# Altium PCB esp8266sensor.PcbDoc
Units mm, origin at the board's own origin, x right, y up, seen from the top; angles counter-clockwise.
Board outline 69 x 25.25 mm, 2 copper layers (Top Layer, Bottom Layer), stack 1.57 mm thick; 37 components, 21 nets, 86 pads, 60 vias.
Unrouted connection lines stored in the file: 9.
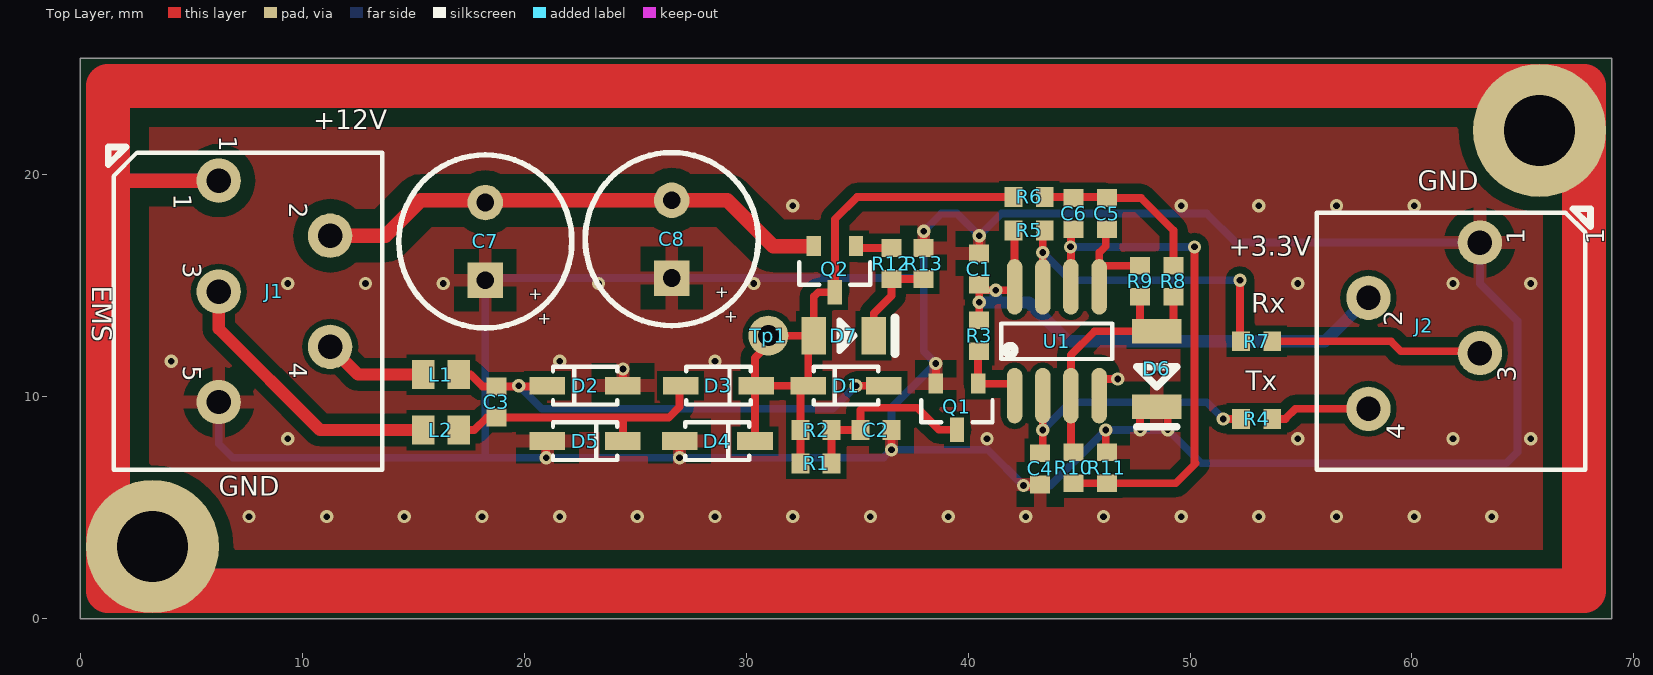
[diagram p0: Top Layer view]
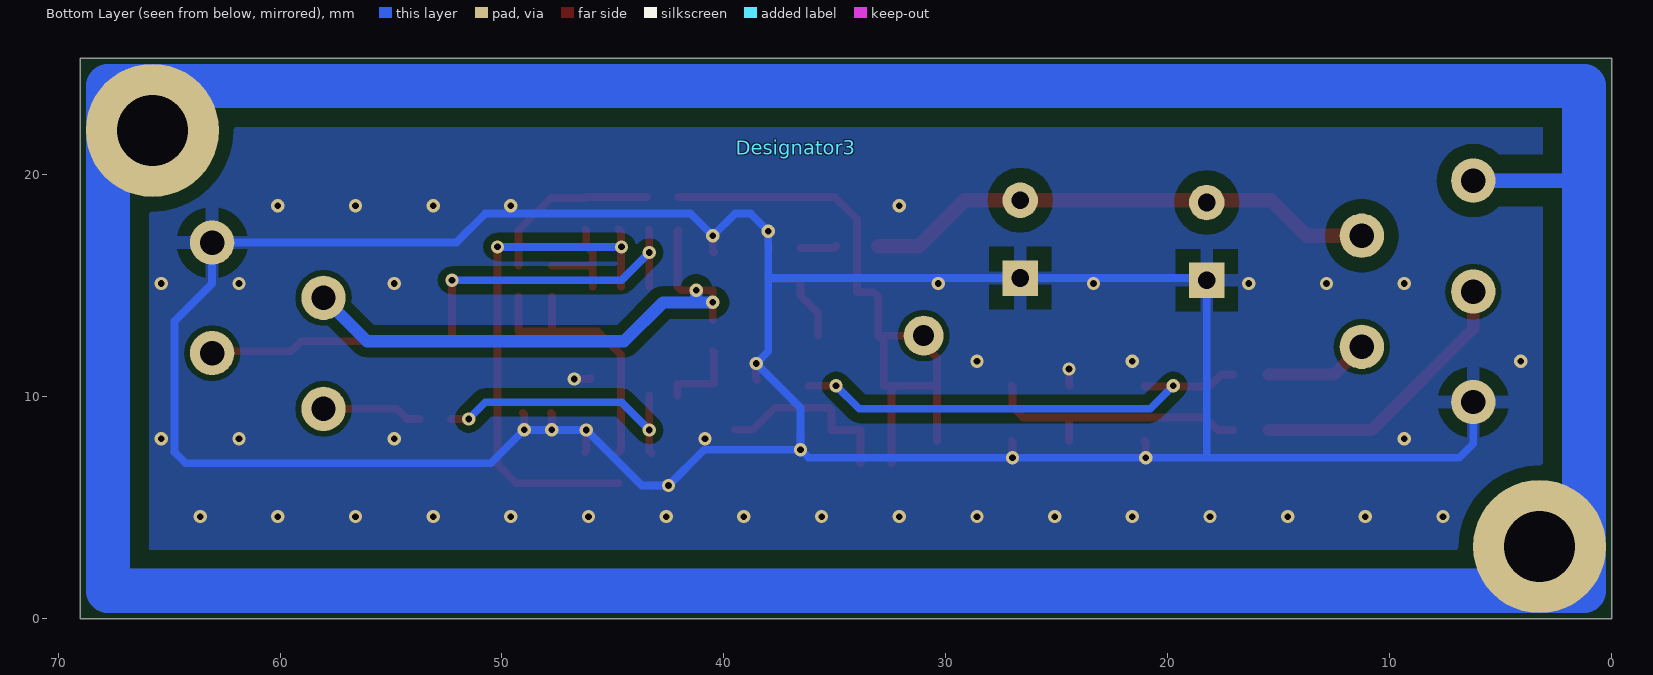
[diagram p1: Bottom Layer view, seen from below]
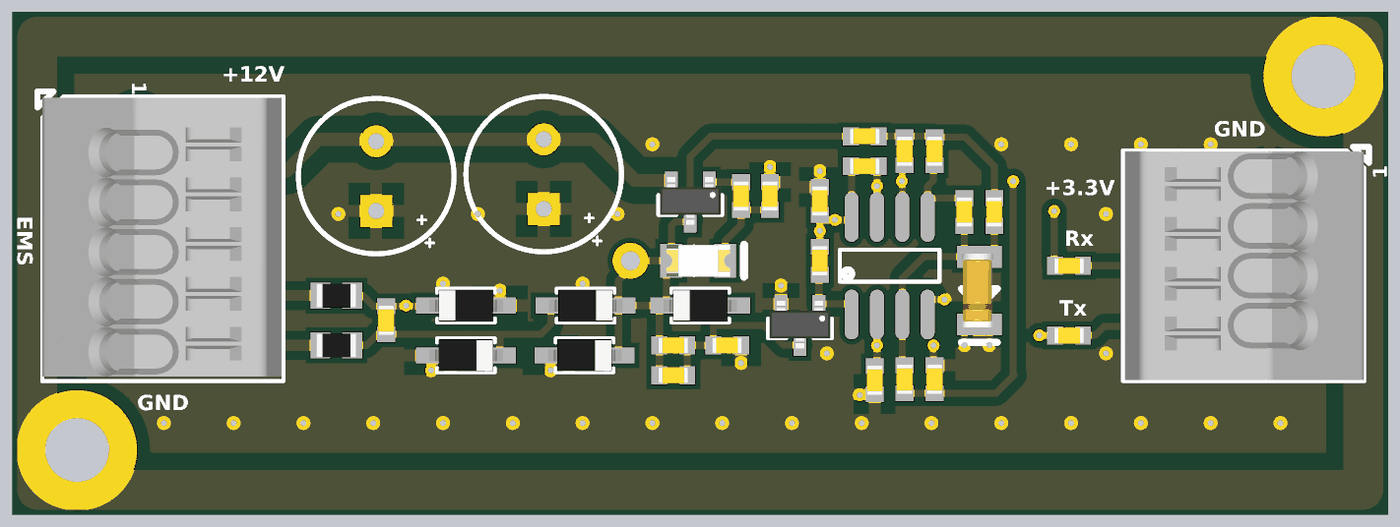
[diagram p2: 3D render of the assembled board from above, using the file's embedded part models]

## Layer stack, top to bottom
Top Solder: solder mask 0.01, Solder Resist, Dk 3.5
Top Layer: signal copper 0.035
Dielectric1: core 1.5, FR-4, Dk 4.2
Bottom Layer: signal copper 0.035
Bottom Solder: solder mask 0.01, Solder Resist, Dk 3.5

## Board outline
0,0 0,25.25 69,25.25 69,0

## Design rules (kind name [scope] priority, off if disabled: settings)
Clearance Clearance_1 [InNet('GND') vs InNet('SHLD')] p1: gap=0.65 ignorepadtopadclearanceinfootprint=FALSE except(0.85: Arc-Fill Arc-Poly Arc-Region Arc-Hole Track-Fill Track-Poly Track-Region Track-Hole)
Clearance Clearance_2 [InNet('GND') vs InNet('+12V')] p2: gap=0.65 ignorepadtopadclearanceinfootprint=FALSE except(0.85: Arc-Fill Arc-Poly Arc-Region Arc-Hole Track-Fill Track-Poly Track-Region Track-Hole)
Clearance [All] p3: gap=0.25 ignorepadtopadclearanceinfootprint=FALSE except(0.45: Arc-Fill Arc-Poly Arc-Region Track-Fill Track-Poly Track-Region)
ComponentClearance ComponentClearance_logo [HasFootprint('Develer_logo_30x12mm_PCB_NOTE') vs HasFootprint('Develer_logo_30x12mm_TB_Top')] p1: gap=0 collisioncheckmode=3 verticalgap=0 showdistances=FALSE
ComponentClearance [All] p2: gap=0.25 collisioncheckmode=3 verticalgap=0.25 showdistances=FALSE
DiffPairsRouting [All] p1: maxlimit=0.25 minlimit=0.25 mostfreqgap=0.25 toplayer_minwidth=0.25 toplayer_maxwidth=0.25 toplayer_prefwidth=0.25 bottomlayer_minwidth=0.25 bottomlayer_maxwidth=0.25 bottomlayer_prefwidth=0.25 maxuncoupledlength=12.7
Height [All] p1: minheight=0 maxheight=25 prefheight=12.5
HoleSize [All] p1: absolutevalues=TRUE maxlimit=10 minlimit=0.2 maxpercent=80.000 minpercent=20.000
HoleToHoleClearance [All] p1: gap=0.25 allowstackedmicrovias=TRUE
MinimumSolderMaskSliver [All] p1: minsoldermaskwidth=0.15
PlaneClearance [All] p1: clearance=0.5
PlaneConnect PlaneConnect_via [isvia] p1: planeconnectstyle=Direct reliefexpansion=0.508 reliefentries=4 reliefconductorwidth=0.254 reliefairgap=0.254
PlaneConnect [All] p2: planeconnectstyle=Relief reliefexpansion=0.6 reliefentries=4 reliefconductorwidth=0.6 reliefairgap=0.3
PolygonConnect PolygonConnect_via [isvia] p1: connectstyle=Direct reliefconductorwidth=0.254 reliefentries=4 polygonreliefangle="90 Angle" airgapwidth=0.254
PolygonConnect [All] p2: connectstyle=Relief reliefconductorwidth=0.6 reliefentries=4 polygonreliefangle="90 Angle" airgapwidth=0.6
RoutingCorners [All] p1: cornerstyle=45-Degree minsetback=2.5 maxsetback=2.5
RoutingVias [All] p1: holewidth=0.3 width=0.6 viastyle="Through Hole" minholewidth=0.2 minwidth=0.3 maxholewidth=0.5 maxwidth=1
SilkToSilkClearance [All] p1: silktosilkclearance=0.15
SilkToSolderMaskClearance [IsPad] p1: minsilkscreentomaskgap=0.15 clearancetoexposedcopper=TRUE
SolderMaskExpansion SolderMaskExpansion_via [isVia] p1: expansion=-10
SolderMaskExpansion [All] p2: expansion=0.05
UnRoutedNet [All] p1: checkbadconnections=TRUE
Width [All] p1: maxlimit=5 minlimit=0.15 preferedwidth=0.25
18 further rules are at their usual default settings.

## Components (designator, comment, footprint, x,y, rotation, side; value= is the part's Value field where it differs from the comment)
C1 "100nF" 0603_[1608] 40.5,15.75 r270 top value=100pF
C2 "1.5nF" 0603_[1608] 35.85,8.5 r180 top value=100pF
C3 "68pF" 0603_[1608] 18.75,9.761 r90 top value=100pF
C4 "10nF" 0603_[1608] 43.25,6.75 r90 top value=100pF
C5 "10uF" 0603_[1608] 46.25,18.25 r90 top value=100pF
C6 "1nF" 0603_[1608] 44.75,18.25 r90 top value=100pF
C7 "820uF" CAP_CYL_3.5mm_D8mm 18.25,17 r90 top value=100pF
C8 "820uF" CAP_CYL_3.5mm_D8mm 26.651,17.099 r90 top value=100pF
D1 "MBR0530" SOD-123_K2-A1 34.5,10.5 r180 top
D2 "MBR0530" SOD-123_K2-A1 22.75,10.5 r180 top
D3 "MBR0530" SOD-123_K2-A1 28.75,10.5 r0 top
D4 "MBR0530" SOD-123_K2-A1 28.7,8 r0 top
D5 "MBR0530" SOD-123_K2-A1 22.75,8 r0 top
D6 "1N4148" SOD-80C 48.5,11.25 r90 top
D7 "LED" 1206_[3216]_K1-A2_LED 34.4,12.75 r180 top
Designator3 "Comment" db_firma 36.75,21.25 r180 bottom
J1 "EMS" CON_5P_WAGO_2.5MM 8.75,14.75 r270 top
J2 "SUPPLY" CON_4P_WAGO_2.5MM 61.75,12.5 r90 top
L1 "220 ohm @ 100MHz" 0805_[2012] 16.25,11 r180 top
L2 "220 ohm @ 100MHz" 0805_[2012] 16.25,8.5 r180 top
Q1 "BC817" SOT-23 39.5,9.55 r270 top
Q2 "BC817" SOT-23 34,15.75 r270 top
R1 "470R" 0603_[1608] 33.15,7 r0 top value=1K
R2 "470R" 0603_[1608] 33.15,8.5 r0 top value=1K
R3 "4k7" 0603_[1608] 40.5,12.75 r270 top value=1K
R4 "0R" 0603_[1608] 53,9 r0 top value=1K
R5 "4k7" 0603_[1608] 42.75,17.5 r0 top value=1K
R6 "10k" 0603_[1608] 42.75,19 r0 top value=1K
R7 "100R" 0603_[1608] 53,12.5 r0 top value=1K
R8 "360R" 0603_[1608] 49.25,15.2 r90 top value=1K
R9 "47k" 0603_[1608] 47.75,15.2 r90 top value=1K
R10 "10k" 0603_[1608] 44.75,6.8 r270 top value=1K
R11 "100k" 0603_[1608] 46.25,6.8 r270 top value=1K
R12 "10k" 0603_[1608] 36.55,16 r270 top value=1K
R13 "10k" 0603_[1608] 38,16 r270 top value=1K
Tp1 "UEMS" TEST_POINT_THD_D1.8MM 31,12.75 r0 top
U1 "LM393N" SOIC8 44,12.5 r90 top

## Footprints (in the part's own frame and the unit in brackets; to place one, negate y for a bottom-side part, rotate by r counter-clockwise, add the part's x,y. Pads: shape width x height; smd on the part's side, far side on the other; paste and mask are expansions set on the pad)
0603_[1608] [mm] "Chip Capacitor, Body 1.6x0.8mm, IPC High Density"
  rect 0.8x0.9 smd: 1(-0.7,0) 2(0.7,0)
  body extent -0.75,-0.4 0.75,0.4, height 0.67
0805_[2012] [mm] "Chip Resistor, Body 2.0x1.2mm, IPC High Density"
  rect 1x1.3 smd: 1(-0.8,0) 2(0.8,0)
  body extent -1,-0.6 1,0.6, height 0.62
1206_[3216]_K1-A2_LED [mm] "Chip Capacitor, Body 3.2x1.6mm, IPC High Density"
  rect 1.1x1.7 smd: 1(-1.35,0) 2(1.35,0)
  silkscreen extent -2.3,-0.8 0.2,0.8, body extent -1.6,-0.8 1.6,0.8, height 0.68
CAP_CYL_3.5mm_D8mm [mm] "Capacitor cylinder pitch 3.5mm Diameter 8mm hole 0.8mm"
  rect 1.6x1.6 hole 0.8: 1(-1.75,0)
  round 1.6 hole 0.8: 2(1.75,0)
  silkscreen extent -3.9,-3.9 3.9,3.9, body extent -4,-4 4,4, height 12.1
CON_4P_WAGO_2.5MM [mm]
  round 2 hole 1.1: 1(4.447,-1.31) 2(1.957,3.71) 3(-0.532,-1.31) 4(-3.046,3.71)
  silkscreen extent -5.8,-6.29 5.97,6.05, body extent -5.75,-6.05 5.75,5.95, height 13.1
CON_5P_WAGO_2.5MM [mm]
  round 2 hole 1.1: 1(-4.989,-2.51) 2(-2.504,2.51) 3(0.011,-2.51) 4(2.5,2.51) 5(4.989,-2.51)
  silkscreen extent -6.5,-7.49 8.04,4.85, body extent -6.19,-7.25 7.81,4.75, height 13.2
db_firma [mm]
SOD-80C [mm] "Melf Body 4.5 x 2.5 mm (LxW typ)"
  rect 1.1x2.25 smd: 1(-1.7,0) 2(1.7,0)
  silkscreen extent -2.6,-0.9 0.1,0.9, body extent -1.85,-0.7 1.85,0.9, height 1.6
SOD-123_K2-A1 [mm] "SOD-123; 2 Leads; Body 2.7 x 1.6 mm, (LxW)"
  rect 1.6x0.8 smd: 1(-1.7,0) 2(1.7,0)
  silkscreen extent -1.45,-0.85 1.45,0.85, body extent -1.85,-0.8 1.85,0.8, height 1.27
SOIC8 [mm] "SOIC, 8-Leads, Body 4.9x3.8mm, Pitch 1.27mm, IPC Low Density"
  oval 2.5x0.7 smd: 1(-2.45,1.905) 2(-2.45,0.635) 3(-2.45,-0.635) 4(-2.45,-1.905) 5(2.45,-1.905) 6(2.45,-0.635) 7(2.45,0.635) 8(2.45,1.905)
  silkscreen extent -0.8,-2.5 0.8,2.5, body extent -2,-2.5 2,2.5, height 1.75
SOT-23 [mm] "SOT23, 3-Leads, Body 2.9x1.3mm, Pitch 0.95mm, Lead Span 2.5mm, IPC High Density"
  rect 0.9x0.65 smd: 1(-1.038,0.95) 2(-1.038,-0.95)
  rect 1.1x0.65 smd: 3(1.038,0)
  silkscreen extent -0.3,-1.6 0.7,1.6, body extent -1.2,-1.52 1.2,1.52, height 1.22
TEST_POINT_THD_D1.8MM [mm] "Test point D=1.6MM"
  round 1.8 hole 0.95 paste-10 mask+0.05: 1(0,0)

## Part data
C1 C2 C3 C4 C5 C6 C7 C8: library part Cap, "Ceramic X7R 50V", LatestRevisionDate=17-Jul-2002, LatestRevisionNote="Re-released for DXP Platform.", PackageDescription="Radial Cap, Thru-Hole; 2 Leads; 0.3 in Pin Spacing", PackageReference=RAD-0.3, Published=8-Jun-2000, Publisher="Altium Limited"
D1 D2 D3 D4 D5: library part Diode_SCHOTTKY, "Schottky Diodes"
D6: library part Diode
D7: "Multicolor LED"
J1: library part "Header 5", "Header, 5-Pin", LatestRevisionDate=17-Jul-2002, LatestRevisionNote="Re-released for DXP Platform.", Publisher="Altium Limited"
J2: library part "Header 4", "Header, 4-Pin", LatestRevisionDate=17-Jul-2002, LatestRevisionNote="Re-released for DXP Platform.", Publisher="Altium Limited"
L1 L2: library part Inductor, "WE 742792022"
Q1 Q2: "BJT NPN"
R1 R2 R3 R4 R5 R6 R7 R8 R9 R10 R11 R12 R13: library part Res1, "Resistor", Published=8-Jun-2000, Publisher="Altium Limited", Revision="July-2002: Re-released for DXP Platform."
Tp1: library part Test_point, "Test point"
U1: library part LM358, "Op Amp."

## Free pads (board coordinates)
  round 6 hole 3.2: Hole(3.25,3.25) Hole(65.75,22)

## Via types
v1: diameter 0.6, hole 0.3, Top Layer to Bottom Layer, 60 vias

## Nets (pads, with @x,y where several pads share a name; then routed paths per layer and width w, separated by ;. In a path a pad name is that pad's centre, name@x,y a point inside that pad or via, vN(x,y) a via of type N, cw(c..) or ccw(c..) an arc to the next point about the centre after c; other vN are vias at no path point)
+3.3V: C1.2 J2.2 R3.1 R5.1 U1.8 | length 25.2
  Top Layer w0.35: R3.1 v1(40.5,14.25) 40.5,14.8 v1(41.25,14.8) 41.945,14.8 U1.8 42.095,17.455 R5.1
  Bottom Layer w0.55: v1(40.5,14.25) 41.25,14.25 ; v1(41.25,14.8) 41.25,14.25 ; J2.2 56.082,12.5 44.5,12.5 42.75,14.25 41.25,14.25
+12V: C7.2 C8.2 J1.2 Q2.2 | length 23.3
  Top Layer w0.65: J1.2 13.754,17.254 15.349,18.849 C8.2 29.155,18.849 31.216,16.788 Q2.2
GND: C1.1 C2.1 C4.1 C7.1 C8.1 D2.1 D4.1 D5.1 D6.1 J1.5 J2.1 Q1.2 R11.1 R13.1 U1.4 | length 148.5
  Top Layer w0.35: v1(21,7.25) 21,7.95 D5.1 ; D2.1@24.4,10.5 24.45,10.55 v1(24.45,11.25) ; v1(27,7.25) 27,7.95 D4.1@27.05,8 ; v1(36.55,7.615) 36.55,8.315 C2.1@36.6,8.365 ; R13.1@37.95,16.705 38,16.755 v1(38,17.455) ; Q1.2@38.5,10.75 38.55,10.8 v1(38.55,11.5) ; C1.1@40.45,16.5 40.5,16.55 v1(40.5,17.25) ; v1(42.5,6) 43.2,6 C4.1@43.25,5.95 ; U1.4@46,10.85 46.05,10.8 v1(46.75,10.8) ; v1(46.2,8.5) 46.2,7.55 R11.1 ; v1(47.75,8.513) 47.75,9.213 D6.1@47.8,9.263 ; v1(49,8.513) 49,9.213 D6.1@49.05,9.263
  Bottom Layer w0.35: J1.5 6.24,7.883 6.872,7.25 18.25,7.25 ; 18.25,7.25 v1(21,7.25) v1(27,7.25) 36.185,7.25 v1(36.55,7.615) ; 18.25,7.25 C7.1 18.349,15.349 C8.1 37.901,15.349 38,15.25 ; v1(36.55,7.615) 40.885,7.615 v1(42.5,6) 43.7,6 v1(46.2,8.5) 48.987,8.5 v1(49,8.513) 50.512,7 64.25,7 64.75,7.5 64.75,13.41 63.06,15.1 J2.1 52.053,16.947 50.75,18.25 41.5,18.25 v1(40.5,17.25) 39.5,18.25 38.795,18.25 v1(38,17.455) 38,15.25 ; v1(36.55,7.615) 36.55,9.5 v1(38.55,11.5) 38,12.05 38,15.25
  other v1: 7.6,4.6 11.1,4.6 14.6,4.6 18.1,4.6 21.6,4.6 25.1,4.6 28.6,4.6 32.1,4.6 35.6,4.6 39.1,4.6 42.6,4.6 46.1,4.6 49.6,4.6 53.1,4.6 56.6,4.6 60.1,4.6 63.6,4.6 9.35,8.1 40.85,8.1 54.85,8.1 61.85,8.1 65.35,8.1 4.1,11.6 21.6,11.6 28.6,11.6 9.35,15.1 12.85,15.1 16.35,15.1 23.35,15.1 30.35,15.1 54.85,15.1 61.85,15.1 65.35,15.1 32.1,18.6 49.6,18.6 53.1,18.6 56.6,18.6 60.1,18.6
NetC2_2: C2.2 Q1.3 R1.2 R2.2 | length 8.5
  Top Layer w0.35: R1.2 R2.2 C2.2 35.15,9.4 35.25,9.5 37.704,9.5 38.691,8.513 Q1.3
NetC3_1: C3.1 D3.1 D5.2 L2.1 | length 12.4
  Top Layer w0.35: L2.1 17.75,8.5 18.311,9.061 C3.1 24.45,9.061 ; D5.2 24.45,9.061 ; D3.1 27,10.45 27,9.55 26.511,9.061 24.45,9.061
NetC3_2: C3.2 D1.1 D2.2 L1.1 | length 21.6
  Top Layer w0.35: L1.1 17.587,11 18.127,10.461 C3.2 21.011,10.461 D2.2 ; v1(34.95,10.5) D1.1
  Bottom Layer w0.35: v1(19.75,10.5) 20.796,9.454 33.904,9.454 v1(34.95,10.5)
NetC4_2: C4.2 R4.1 U1.2 | length 12.4
  Top Layer w0.35: C4.2 43.365,7.565 v1(43.365,8.5) U1.2 ; v1(51.5,9) R4.1
  Bottom Layer w0.35: v1(43.365,8.5) 44.615,9.75 50.75,9.75 v1(51.5,9)
NetC5_1: C5.1 R9.2 U1.5 | length 4.7
  Top Layer w0.35: U1.5 U1.5@45.905,15.75 ; C5.1 46.2,17.5 46.2,16.788 45.905,16.492 U1.5@45.905,15.75 ; R9.2 46.055,15.9 U1.5@45.905,15.75
NetC5_2: C5.2 C6.2 R6.2 R8.2 | length 8
  Top Layer w0.35: R6.2 46.2,19 C5.2 47.8,18.95 49.25,17.5 R8.2
NetC6_1: C6.1 R10.2 R11.2 U1.6 | length 23.9
  Top Layer w0.35: U1.6 44.635,17.435 C6.1 ; R10.2 R11.2 49.35,6.1 50.25,7 50.2,7.05 v1(50.2,16.75)
  Bottom Layer w0.35: v1(44.615,16.75) v1(50.2,16.75)
NetD7_1: D7.1 R12.2 R13.2 | length 4.3
  Top Layer w0.35: D7.1 35.75,13.75 36.55,14.55 R12.2 R13.2
NetJ1_3: J1.3 L2.2 | length 12.8
  Top Layer w0.55: J1.3 6.24,13.06 10.8,8.5 L2.2
NetJ1_4: J1.4 L1.2 | length 4.7
  Top Layer w0.55: J1.4 12.51,11 L1.2
NetQ1_1: Q1.1 R3.2 U1.1 | length 3.7
  Top Layer w0.35: R3.2 40.45,12 Q1.1 42.095,10.588 U1.1
NetQ2_1: Q2.1 R12.1 | length 1.6
  Top Layer w0.35: Q2.1 35.038,16.7 R12.1
NetR5_2: R5.2 R7.1 U1.7 | length 14.8
  Top Layer w0.35: U1.7 R5.2@43.365,17.55 ; v1(52.25,15.25) 52.25,12.55 R7.1
  Bottom Layer w0.35: v1(43.365,16.5) 44.615,15.25 v1(52.25,15.25)
Rx: J2.3 R7.2 | length 9.6
  Top Layer w0.35: R7.2 59.05,12.5 59.5,12.05 62.979,12.05 J2.3
SHLD: J1.1 pad.Hole | length 368.1
  Top Layer w0.35: 1.25,19.5 1.011,19.739 1.25,19.739
  Top Layer w0.65: 1.25,19.739 J1.1
  Top Layer w2: pad.Hole@1.25,1.25 1.25,19.5 1.25,19.739 1.25,24 67.75,24 67.75,1.25 pad.Hole@1.25,1.25
  Bottom Layer w0.35: 1.25,19.5 1.011,19.739 1.25,19.739
  Bottom Layer w0.65: 1.25,19.739 J1.1
  Bottom Layer w2: pad.Hole@1.25,1.25 1.25,19.5 1.25,19.739 1.25,24 67.75,24 67.75,1.25 pad.Hole@1.25,1.25
Tx: J2.4 R4.2 | length 4.5
  Top Layer w0.35: R4.2 54.296,9 54.75,9.454 J2.4
UEMS: D1.2 D3.2 D4.2 D7.2 Q2.3 R1.1 R2.1 R6.1 Tp1.1 | length 29.8
  Top Layer w0.35: D4.2 30.4,11.75 31,12.35 Tp1.1 D7.2@33,12.75 ; D3.2 D1.2@32.25,10.5 ; R1.1 R2.1 32.45,10.3 D1.2@32.25,10.5 ; R6.1 35,19 34,18 Q2.3 33.25,14.712 33.05,14.512 D7.2 32.8,12.5 D1.2 D1.2@32.25,10.5
UREF: D6.2 R8.1 R9.1 R10.1 U1.3 | length 12.6
  Top Layer w0.35: R10.1 44.635,7.615 U1.3 44.635,11.885 45.7,12.95 D6.2@47.75,12.95 ; R9.1 D6.2@47.75,12.95 ; R8.1 49.25,12.95 D6.2 D6.2@47.75,12.95

## Polygon pours and split planes (outlines as drawn)
GND on Bottom Layer "GND_L02_P001" (solid, pour order 1): 0,0 0,25.25 69,25.25 69,0
GND on Top Layer "GND_L01_P000" (solid, pour order 0): 0,0 0,25.25 69,25.25 69,0

## Silkscreen, mask and mechanical layers (free items; w line width, h text height)
Top Overlay:
  text "+12V" at 10.5,21.75 h1.5
  text "GND" at 60.25,19 h1.5
  text "+3.3V" at 51.75,16.05 h1.5
  text "EMS" at 0.25,15 h1.5 r270
  text "Rx" at 52.75,13.5 h1.5
  text "Tx" at 52.5,10 h1.5
  text "GND" at 6.25,5.25 h1.5
Outline:
  the board outline again, w0.2
Drawing:
  text "Mechanical Characteristics" at 142.5,-39.5 h5
  text "Mechanical Characteristics" at 142.5,-39.5 h5
Assembly_top:
  text "Assembly TOP" at 142.5,-39.5 h5
Assembly_bot:
  text "Assembly Bottom" at -9.5,-39.25 h5
Note_top:
  text "Note TOP" at 142.5,-39.5 h5
Note_bot:
  text "Note Bottom" at -9.5,-39.25 h5
PCB_Note:
  drawing of 186 lines, arcs and shapes, not listed
  text "Plugged Vias" at 176.25,32.25 h5
  text "File Layer names:" at 174.25,29 h3.5
  text "GTO" at 174.25,25 h3
  text "Top Overlay" at 183.25,25 h3
  text "GTP" at 174.25,22 h3
  text "Top Paste" at 183.25,22 h3
  text "GTS" at 174.25,19 h3
  text "Top Solder" at 183.25,19 h3
  text "GTL" at 174.25,16 h3
  text "Top Layer" at 183.25,16 h3
  text "GBL" at 174.25,13 h3
  text "Bottom Layer" at 183.25,13 h3
  text "GBS" at 174.25,10 h3
  text "Bottom Solder" at 183.25,10 h3
  text "GBP" at 174.25,7 h3
  text "Bottom Paste" at 183.25,7 h3
  text "GBO" at 174.25,4 h3
  text "Bottom Overlay" at 183.25,4 h3
  text "GM1" at 174.25,-2 h3
  text "Outline" at 183.25,-2 h3
  text "GM7" at 174.25,-5 h3
  text "PCB_Note" at 183.25,-5 h3
  text "Layer" at 151.353,-10.546 h1.52
  text "Name" at 157.338,-10.546 h1.52
  text "Material" at 168.92,-10.546 h1.52
  text "Thickness" at 179.088,-10.546 h1.52
  text "Constant" at 187.546,-10.546 h1.52
  text "Board Layer Stack" at 195.471,-10.546 h1.52
  text "1" at 151.353,-13.594 h1.52
  text "Top Overlay" at 157.338,-13.594 h1.52
  text "2" at 151.353,-16.642 h1.52
  text "Top Solder" at 157.338,-16.642 h1.52
  text "Solder Resist" at 168.92,-16.642 h1.52
  text "0.39mil" at 179.088,-16.642 h1.52
  text "3.5" at 187.546,-16.642 h1.52
  text "3" at 151.353,-19.69 h1.52
  text "Top Layer" at 157.338,-19.69 h1.52
  text "Copper" at 168.92,-19.69 h1.52
  text "1.38mil" at 179.088,-19.69 h1.52
  text "4" at 151.353,-22.738 h1.52
  text "Dielectric1" at 157.338,-22.738 h1.52
  text "FR-4" at 168.92,-22.738 h1.52
  text "59.06mil" at 179.088,-22.738 h1.52
  text "4.2" at 187.546,-22.738 h1.52
  text "5" at 151.353,-25.786 h1.52
  text "Bottom Layer" at 157.338,-25.786 h1.52
  text "Copper" at 168.92,-25.786 h1.52
  text "1.38mil" at 179.088,-25.786 h1.52
  text "6" at 151.353,-28.834 h1.52
  text "Bottom Solder" at 157.338,-28.834 h1.52
  text "Solder Resist" at 168.92,-28.834 h1.52
  text "0.39mil" at 179.088,-28.834 h1.52
  text "3.5" at 187.546,-28.834 h1.52
  text "7" at 151.353,-31.882 h1.52
  text "Bottom Overlay" at 157.338,-31.882 h1.52
  text "PCB Note" at 142.5,-39.5 h5
  text "Board Name" at 142.5,-44.05 h3
  text ".prj_name" at 158.5,-44.05 h3
  text "P/N" at 142.5,-47.55 h3
  text ".prj_pn" at 158.5,-47.55 h3
  text "Author" at 142.5,-51.05 h3
  text "AUTHOR" at 158.5,-51.05 h3
  text "Date" at 142.5,-54.65 h3
  text ".prj_date" at 158.5,-54.65 h3
  text "Revision" at 142.5,-58.25 h3
  text ".prj_pcb" at 158.5,-58.25 h3
  text "A4" at 201,-58.25 h3
TitleBlock_top:
  lines w0.3: 115,-59 115,-41.5 141.5,-41.5 ; 141.5,-59 141.5,-47 ; 141.5,-55.5 209,-55.5 ; 141.5,-52 209,-52 ; 141.5,-48.5 209,-48.5 ; 141.5,-47.55 141.5,-45 ; 157.5,-59 157.5,-55.5 157.5,-52 157.5,-48.5 157.5,-45 ; 199,-59 199,-55.5 ; 209,-45 157.5,-45 ; 209,-41.5 157.5,-41.5 ; 209,-34.5 157.5,-34.5 141.5,-34.5 141.5,-38 141.5,-41.5 ; 141.5,-45 141.5,-41.5 ; 141.5,-45 157.5,-45 ; 141.5,-41.5 157.5,-41.5 ; 157.5,-45 157.5,-41.5 ; -81,-64 214,-64 214,146 -81,146 -81,-64 ; -76,-59 209,-59 209,141 -76,141 -76,-59
  text "Board Name" at 142.5,-44.05 h3
  text ".prj_name" at 158.5,-44.05 h3
  text "P/N" at 142.5,-47.55 h3
  text ".prj_pn" at 158.5,-47.55 h3
  text "Author" at 142.5,-51.05 h3
  text "AUTHOR" at 158.5,-51.05 h3
  text "Date" at 142.5,-54.65 h3
  text ".prj_date" at 158.5,-54.65 h3
  text "Revision" at 142.5,-58.25 h3
  text ".prj_pcb" at 158.5,-58.25 h3
  text "A4" at 201,-58.25 h3
TitleBlock_bot:
  lines w0.3: -81,-64 -81,146 214,146 ; -76,-59 -76,141 209,141 ; -76,-55.5 -8.5,-55.5 ; -76,-52 -8.5,-52 ; -76,-48.5 -8.5,-48.5 ; -76,-45 -24.5,-45 ; -76,-41.5 -24.5,-41.5 ; -76,-34.5 -24.5,-34.5 -8.5,-34.5 -8.5,-38 -8.5,-41.5 ; -66,-59 -66,-55.5 ; -24.5,-59 -24.5,-55.5 -24.5,-52 -24.5,-48.5 -24.5,-45 ; -8.5,-59 -8.5,-47 ; -8.5,-47.55 -8.5,-45 ; 18,-59 18,-41.5 -8.5,-41.5 ; -24.5,-45 -24.5,-41.5 ; -24.5,-45 -8.5,-45 ; -24.5,-41.5 -8.5,-41.5 ; -8.5,-45 -8.5,-41.5
  text ".prj_name" at -25.5,-44.05 h3
  text "Board Name" at -9.5,-44.05 h3
  text ".prj_pn" at -25.5,-47.55 h3
  text "P/N" at -9.5,-47.55 h3
  text "AUTHOR" at -25.5,-51.05 h3
  text "Author" at -9.5,-51.05 h3
  text ".prj_date" at -25.5,-54.65 h3
  text "Date" at -9.5,-54.65 h3
  text "A4" at -68,-58.25 h3
  text ".prj_pcb" at -25.5,-58.25 h3
  text "Revision" at -9.5,-58.25 h3

## Text inside footprints (layer, text, board x,y; h text height)
C7: Assembly_top "+" at 20.75,14.3 h0.53 r90; Top Overlay "+" at 21.15,13.2 h0.53 r90; Top Overlay "+" at 20.75,14.3 h0.53 r90
C8: Assembly_top "+" at 29.151,14.399 h0.53 r90; Top Overlay "+" at 29.551,13.299 h0.53 r90; Top Overlay "+" at 29.151,14.399 h0.53 r90
Designator3: Bottom Solder "D" at 35.25,18.125 h1.5 r180; Bottom Solder "B" at 35.25,20.925 h1.5 r180
J1: Top Overlay "5" at 4.36,11.398 h1.4 r270; Top Overlay "3" at 4.36,16.035 h1.4 r270; Top Overlay "2" at 9.14,18.734 h1.4 r270; Top Overlay "4" at 9.14,11.528 h1.4 r270; Top Overlay "1" at 6,21.75 h1.4 r270; Top Overlay "1" at 3.943,19.149 h1.4 r270
J2: Top Overlay "1" at 65.34,16.872 h1.4 r90; Top Overlay "1" at 68.94,16.872 h1.4 r90; Top Overlay "4" at 59.95,8.096 h1.4 r90; Top Overlay "2" at 59.84,13.172 h1.4 r90; Top Overlay "3" at 64.94,10.672 h1.4 r90